# Altium PCB 液晶板.PcbDoc
Units mm, origin at the board's own origin, x right, y up, seen from the top; angles counter-clockwise.
Board outline 152.4 x 101.6 mm, 2 copper layers (Component Side, Bottom Layer), stack 0.325 mm thick; 14 components, 27 nets, 96 pads, 58 vias.
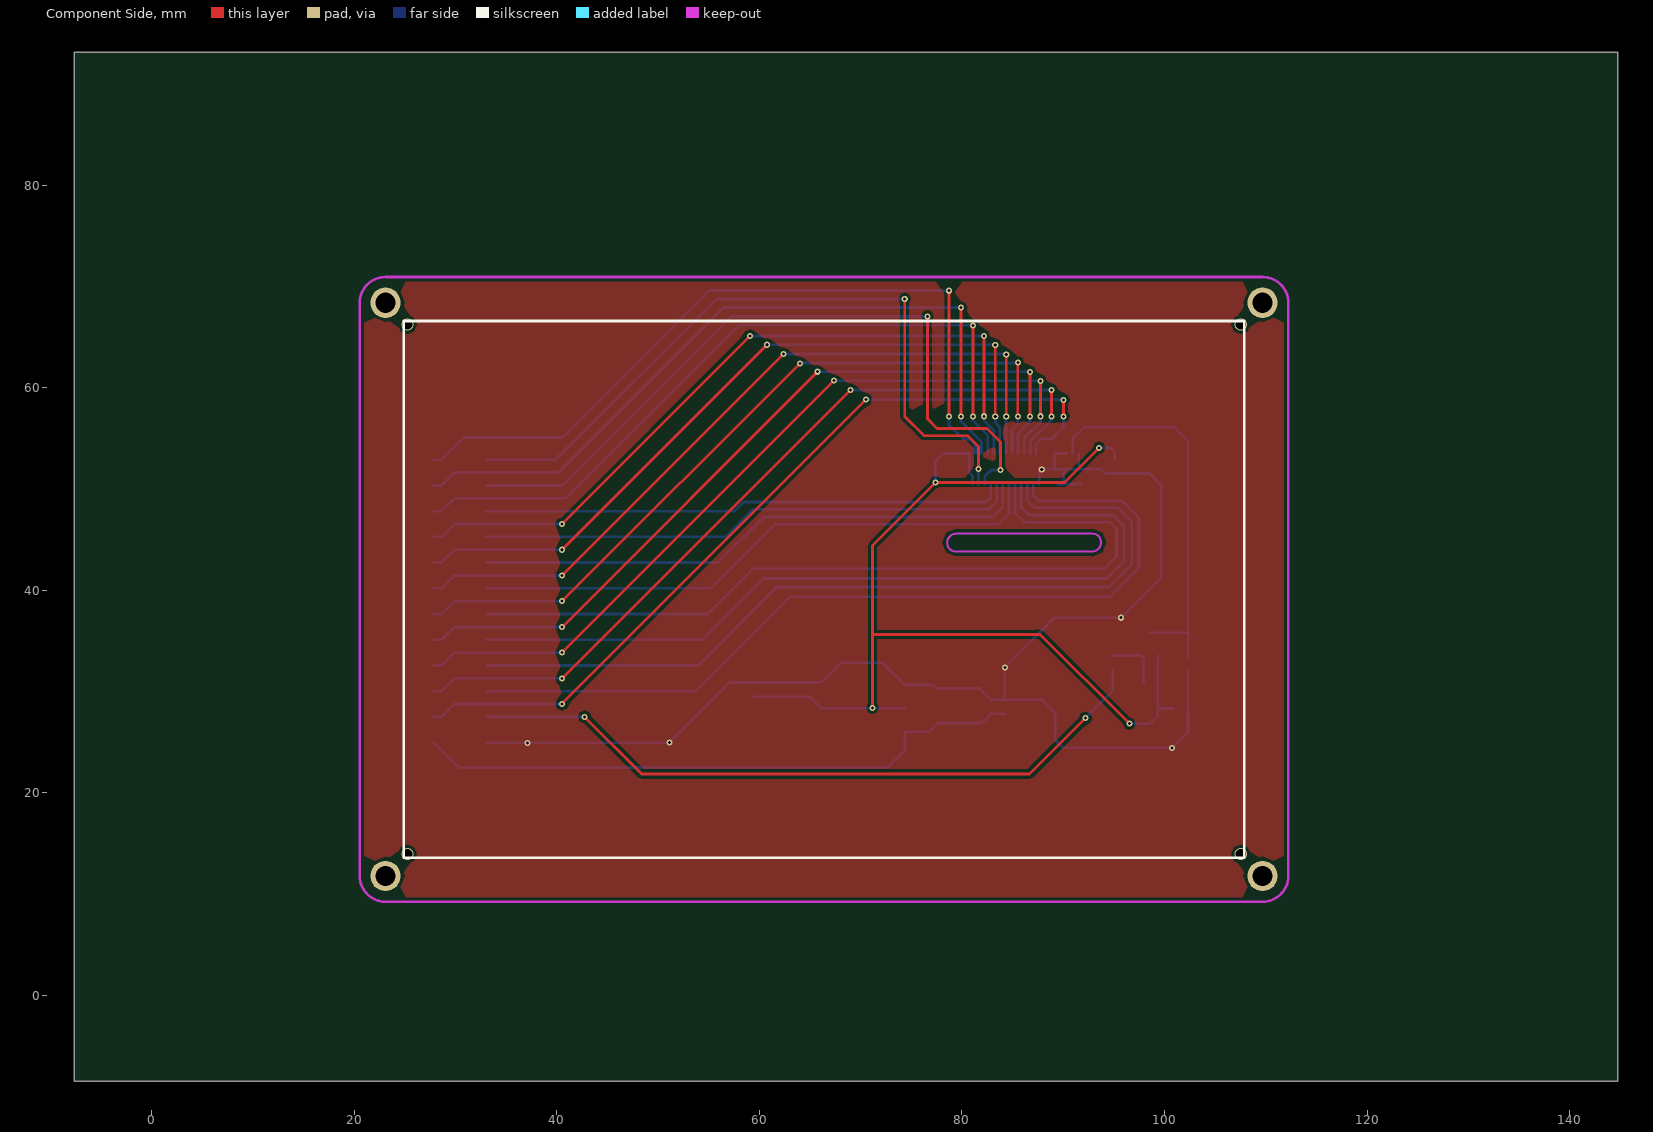
[diagram p0: Component Side view]
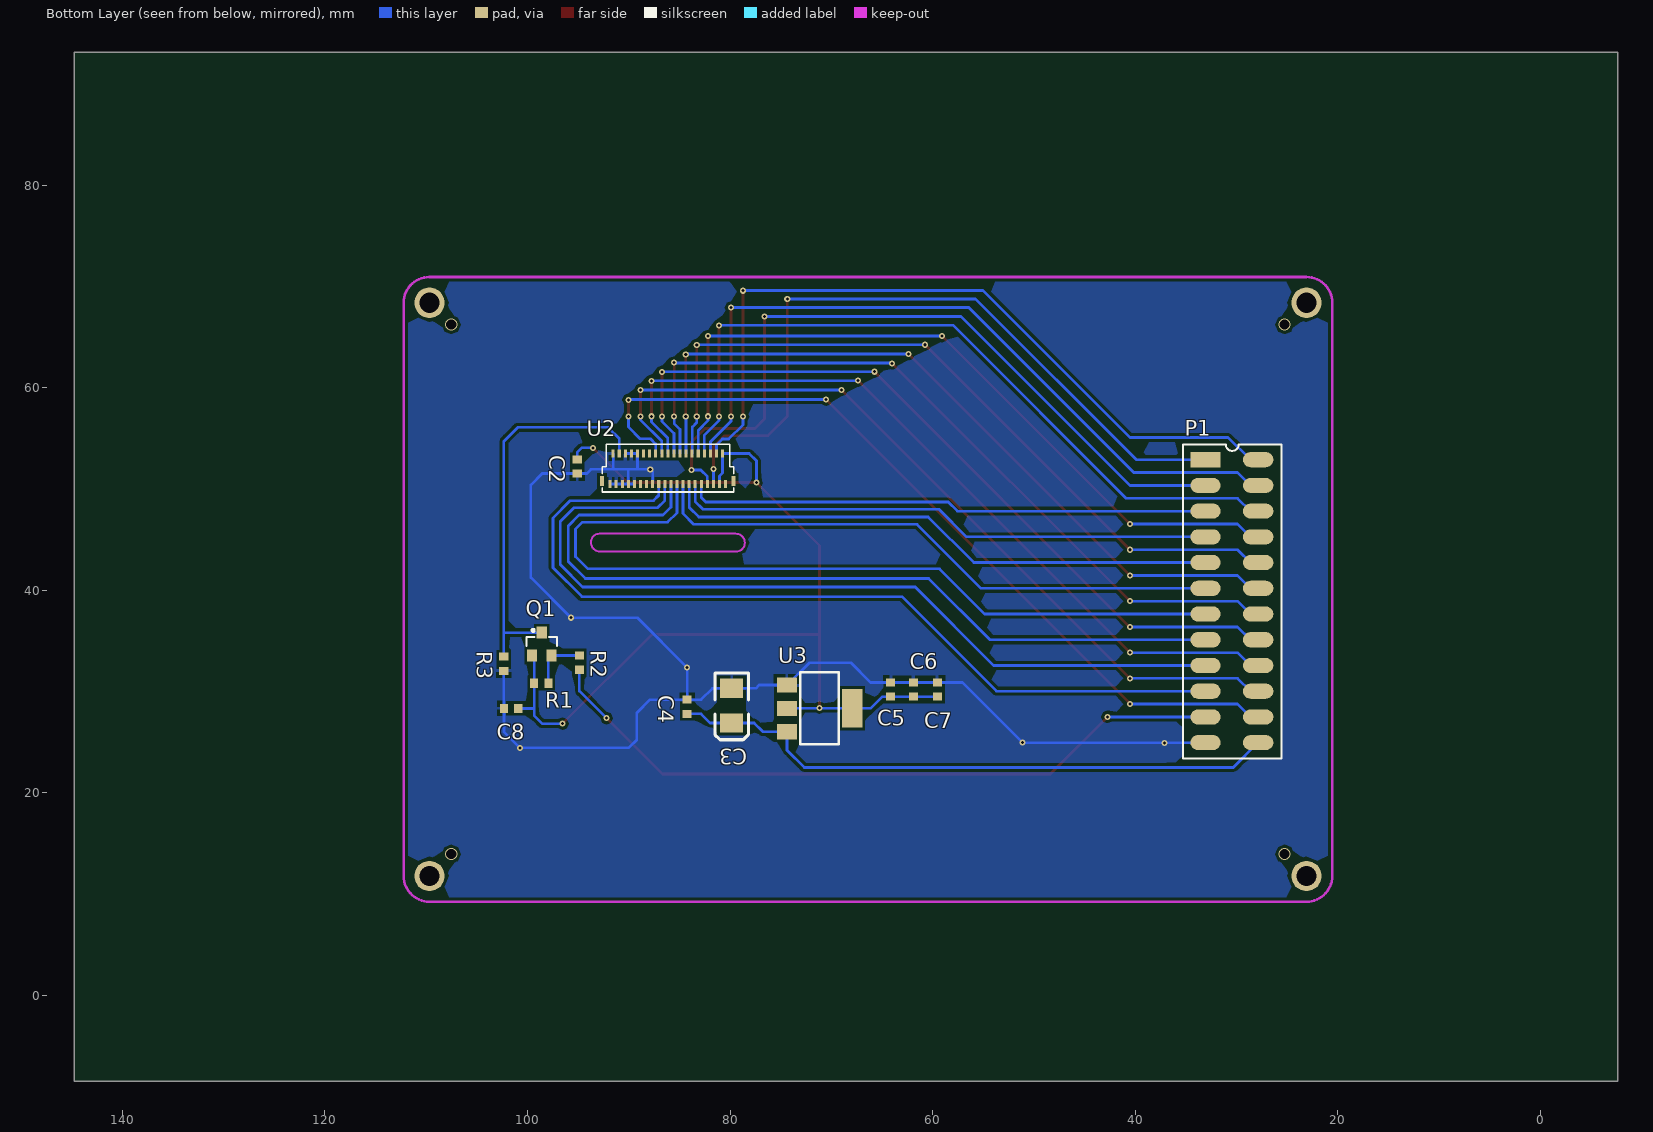
[diagram p1: Bottom Layer view, seen from below]

## Layer stack, top to bottom
Top Solder: solder mask 0.0102, Solder Resist, Dk 3.5
Component Side: signal copper 0.0356
Dielectric 1: core 0.254, FR-4, Dk 4.2
Bottom Layer: signal copper 0.0356
Solder Side: solder mask 0.0102, Solder Resist, Dk 3.5

## Board outline
-7.645,-8.474 144.755,-8.474 144.755,93.126 -7.645,93.126

## Design rules (kind name [scope] priority, off if disabled: settings)
Clearance [All] p1: gap=0.3
PolygonConnect PolygonConnect_1 [IsVia] p1: connectstyle=Direct reliefconductorwidth=0.3 reliefentries=4 polygonreliefangle="90 Angle" airgapwidth=0.3
PolygonConnect [All] p2: connectstyle=Relief reliefconductorwidth=0.3 reliefentries=4 polygonreliefangle="90 Angle" airgapwidth=0.3
RoutingVias [All] p1: holewidth=0.3 width=0.6 viastyle="Through Hole" minholewidth=0.3 minwidth=0.6 maxholewidth=0.3 maxwidth=0.6
SolderMaskExpansion [All] p1: expansion=0.102
UnpouredPolygon [All] p1: allowunpoured=FALSE
Width [All] p1: maxlimit=1 minlimit=0.27 preferedwidth=0.27
29 further rules are at their usual default settings.

## Components (designator, comment, footprint, x,y, rotation, side; value= is the part's Value field where it differs from the comment)
C2 "Cap Semi" 1608[0603] 95.097,52.229 r90 bottom
C3 "Cap Pol2" 3528 79.852,26.896 r270 bottom
C4 "Cap Semi" 1608[0603] 84.237,28.501 r270 bottom
C5 "Cap Semi" 1608[0603] 64.151,30.204 r270 bottom
C6 "Cap Semi" 1608[0603] 61.901,30.204 r270 bottom
C7 "Cap Semi" 1608[0603] 59.523,30.204 r270 bottom
C8 "Cap Semi" 1608[0603] 101.615,28.342 r180 bottom
P1 "Header_2X12" HDR2X12 30.456,38.93 r180 bottom
Q1 "MOSFET-P" SOT23_N 98.598,34.694 r90 bottom
R1 "Res2" 1608[0603] 98.646,30.821 r180 bottom
R2 "Res2" 1608[0603] 94.886,32.859 r270 bottom
R3 "Res2" 1608[0603] 102.354,32.75 r90 bottom
U2 "IPS3P4140" FH26-39S-0.3SHW 86.145,52.008 r180 bottom locked
U3 "AMS1117" SOT223 74.384,30.643 r270 bottom

## Footprints (in the part's own frame and the unit in brackets; to place one, negate y for a bottom-side part, rotate by r counter-clockwise, add the part's x,y. Pads: shape width x height; smd on the part's side, far side on the other; paste and mask are expansions set on the pad)
1608[0603] [mm] "Chip Capacitor, Body 1.6x0.8mm, IPC High Density"
  rect 0.8x0.9 smd: 1(-0.7,0) 2(0.7,0)
  body extent -0.87,-0.48 0.87,0.48, height 1.3
3528 [mil]
  rect 75x90 smd: 1(0,0) 2(-135,0)
  silkscreen extent -195,-65 65,65
FH26-39S-0.3SHW [mm]
  rect 0.3x0.8 smd: 1(5.7,-1.5) 2(5.4,1.5) 3(5.1,-1.5) 4(4.8,1.5) 5(4.5,-1.5) 6(4.2,1.5) 7(3.9,-1.5) 8(3.6,1.5) 9(3.3,-1.5) 10(3,1.5) 11(2.7,-1.5) 12(2.4,1.5) 13(2.1,-1.5) 14(1.8,1.5) 15(1.5,-1.5) 16(1.2,1.5) 17(0.9,-1.5) 18(0.6,1.5) 19(0.3,-1.5) 20(0,1.5) 21(-0.3,-1.5) 22(-0.6,1.5) 23(-0.9,-1.5) 24(-1.2,1.5) 25(-1.5,-1.5) 26(-1.8,1.5) 27(-2.1,-1.5) 28(-2.4,1.5) 29(-2.7,-1.5) 30(-3,1.5) 31(-3.3,-1.5) 32(-3.6,1.5) 33(-3.9,-1.5) 34(-4.2,1.5) 35(-4.5,-1.5) 36(-4.8,1.5) 37(-5.1,-1.5) 38(-5.4,1.5) 39(-5.7,-1.5)
  rect 0.4x1 smd: 40(-6.5,-1.2) 40(6.5,-1.2)
  silkscreen extent -6.5,-2.3 6.5,2.4
HDR2X12 [mm]
  rect 3x1.5 smd: 1(-2.6,13.97)
  oval 3x1.5 smd: 2(-2.6,11.43) 3(-2.6,8.89) 4(-2.6,6.35) 5(-2.6,3.81) 6(-2.6,1.27) 7(-2.6,-1.27) 8(-2.6,-3.81) 9(-2.6,-6.35) 10(-2.6,-8.89) 11(-2.6,-11.43) 12(-2.6,-13.97) 13(2.6,-13.97) 14(2.6,-11.43) 15(2.6,-8.89) 16(2.6,-6.35) 17(2.6,-3.81) 18(2.6,-1.27) 19(2.6,1.27) 20(2.6,3.81) 21(2.6,6.35) 22(2.6,8.89) 23(2.6,11.43) 24(2.6,13.97)
  silkscreen extent -4.8,-15.53 4.9,15.47
SOT23_N [mm] "SOT23, 3-Leads, Body 2.9x1.3mm, Pitch 0.95mm, Lead Span 2.3mm - Reverse Pinning, IPC Medium Density"
  rect 1.2x1 smd: 1(1.125,0) 2(-1.125,-0.95) 3(-1.125,0.95)
  silkscreen extent -0.2,-1.5 1.47,1.5, body extent -0.7,-1.5 0.7,1.5, height 1.1
SOT223 [mil]
  rect 59x79 smd: 1(0,0) 2(90.55,0) 3(181.1,0)
  rect 150x79 smd: 4(89.88,253.54)
  silkscreen extent -49,52 231,202

## Part data
C2 C4 C5 C6 C7 C8: "Capacitor (Semiconductor SIM Model)"
C3: "Polarized Capacitor (Axial)"
Q1: "P-Channel MOSFET"
R1 R2 R3: "Resistor"
U2: "IPS液晶显示屏"
U3: "稳压IC"

## Free pads (board coordinates)
  round 3 hole 2: 0(23.085,11.796) 0(23.085,68.396) 0(109.685,11.796) 0(109.685,68.396)

## Via types
v1: diameter 0.6, hole 0.3, Component Side to Bottom Layer, 54 vias
v2: diameter 1.2, hole 1, Component Side to Bottom Layer, 4 vias

## Nets (pads, with @x,y where several pads share a name; then routed paths per layer and width w, separated by ;. In a path a pad name is that pad's centre, name@x,y a point inside that pad or via, vN(x,y) a via of type N, cw(c..) or ccw(c..) an arc to the next point about the centre after c; other vN are vias at no path point)
3V3: C2.2 C5.2 C6.2 C7.2 C8.2 Q1.3 R1.1 U2.2 U2.3 U3.2 U3.4 | length 108.8
  Component Side w0.27: v1(71.175,28.397) 71.175,35.649 ; v1(93.55,54.071) 90.124,50.645 v1(77.4,50.645) 71.175,44.42 71.175,35.649 ; v1(96.535,26.834) 87.72,35.649 71.175,35.649
  Bottom Layer w0.27: C7.2 C6.2 C5.2 64.956,29.504 66.1,28.36 U3.4 74.367,28.36 U3.2 ; v1(77.4,50.645) 77.4,52.793 78.115,53.508 U2.2 80.745,51.596 81.045,51.296 U2.3 ; v1(93.55,54.071) 94.652,54.071 95.097,53.626 C2.2 ; v1(96.535,26.834) 98.552,26.834 99.346,27.628 R1.1 99.346,33.367 Q1.3 ; 99.346,28.352 99.356,28.342 C8.2
5V: C3.1 C4.2 P1.13 U3.3 | length 60.7
  Bottom Layer w0.27: P1.13 30.315,22.501 72.673,22.501 74.384,24.212 U3.3 76.774,26.043 77.627,26.896 C3.1 81.973,26.896 82.878,27.801 C4.2
GND: C2.1 C3.2 C4.1 C5.1 C6.1 C7.1 C8.1 P1.12 R3.1 U2.25 U2.30 U2.31 U2.32 U2.33 U2.34 U2.35 U2.37 U2.38 U2.39 U3.1 | length 137.8
  Bottom Layer w0.27: P1.12 v1(51.115,24.96) 57.059,30.904 C7.1 C6.1 C5.1 66.122,30.904 68.07,32.852 72.175,32.852 U3.1 77.127,30.643 77.445,30.325 C3.2 81.748,30.325 82.872,29.201 C4.1 ; U2.25 87.645,51.705 v1(87.882,51.942) 90.054,51.942 ; 89.145,51.944 U2.30 U2.32 U2.34 ; U2.31 U2.33 ; U2.38 91.545,51.942 ; U2.39 U2.37 U2.35 U2.33 ; R3.1 102.354,28.381 C8.1 102.315,26.028 v1(100.73,24.443) 90.012,24.443 89.219,25.236 89.219,27.907 87.925,29.201 C4.1 ; C4.1 v1(84.237,32.369) 89.163,37.295 v1(95.715,37.295) 99.678,41.258 99.678,50.399 98.548,51.529 C2.1 94.148,51.529 93.735,51.942 91.545,51.942 ; U2.33 90.045,51.933 90.054,51.942 ; 90.054,51.942 91.545,51.942
  other v1: 37.089,24.933
NetP1_1: P1.1 U2.5 | length 71.7
  Component Side w0.27: v1(74.354,68.775) 74.354,57.18 76.263,55.271 80.557,55.271 81.638,54.19 v1(81.638,51.983)
  Bottom Layer w0.27: P1.1 39.894,52.9 55.769,68.775 v1(74.354,68.775) ; v1(81.638,51.983) 81.638,51.938 81.645,51.945 U2.5
NetP1_2: P1.2 U2.7 | length 74
  Component Side w0.27: v1(76.592,67.044) 76.592,56.939 77.544,55.987 82.466,55.987 83.808,54.645 v1(83.808,51.879)
  Bottom Layer w0.27: P1.2 40.512,50.36 57.196,67.044 v1(76.592,67.044) ; U2.7 82.245,51.23 82.894,51.879 v1(83.808,51.879)
NetP1_3: P1.3 U2.9 | length 51.7
  Bottom Layer w0.27: P1.3 57.554,47.82 58.455,48.721 82.403,48.721 82.845,49.163 U2.9
NetP1_4: P1.4 U2.11 | length 53.6
  Bottom Layer w0.27: P1.4 56.647,45.28 59.372,48.005 82.659,48.005 83.445,48.791 U2.11
NetP1_5: P1.5 U2.13 | length 55.6
  Bottom Layer w0.27: P1.5 55.935,42.74 60.445,47.25 83.09,47.25 84.045,48.205 U2.13
NetP1_6: P1.6 U2.15 | length 57.6
  Bottom Layer w0.27: P1.6 55.222,40.2 61.54,46.518 83.588,46.518 84.645,47.575 U2.15
NetP1_7: P1.7 U2.17 | length 80.8
  Bottom Layer w0.27: P1.7 54.86,37.66 59.318,42.118 94.048,42.118 95.256,43.327 95.256,46.048 94.576,46.728 86.169,46.728 85.245,47.652 U2.17
NetP1_8: P1.8 U2.19 | length 82.8
  Bottom Layer w0.27: P1.8 54.342,35.12 60.397,41.175 94.29,41.175 95.98,42.865 95.98,46.355 94.904,47.431 86.628,47.431 85.845,48.214 U2.19
NetP1_9: P1.9 U2.21 | length 84.9
  Bottom Layer w0.27: P1.9 53.98,32.58 61.718,40.318 94.553,40.318 96.77,42.535 96.77,46.816 95.431,48.155 87.156,48.155 86.445,48.866 U2.21
NetP1_10: P1.10 U2.23 | length 86.9
  Bottom Layer w0.27: P1.10 53.699,30.04 63.033,39.375 94.64,39.375 97.495,42.229 97.495,47.145 95.783,48.857 87.573,48.857 87.045,49.385 U2.23
NetP1_11: P1.11 R2.2 | length 69.7
  Component Side w0.27: v1(42.742,27.5) 48.383,21.859 86.677,21.859 v1(92.201,27.383)
  Bottom Layer w0.27: P1.11 v1(42.742,27.5) ; v1(92.201,27.383) 94.886,30.068 R2.2
NetP1_14: P1.14 U2.24 | length 82.2
  Component Side w0.27: v1(40.513,28.767) 40.513,28.845 v1(70.513,58.845) ; v1(90.041,57.177) v1(90.041,58.794)
  Bottom Layer w0.27: P1.14 28.628,27.5 29.895,28.767 v1(40.513,28.767) ; v1(70.513,58.845) v1@90.041,58.845 ; U2.24 87.345,54.444 87.869,54.968 88.876,54.968 90.041,56.133 v1(90.041,57.177)
NetP1_15: P1.15 U2.22 | length 80.5
  Component Side w0.27: v1(40.513,31.307) v1(68.997,59.791) ; v1(88.853,57.158) v1(88.853,59.8)
  Bottom Layer w0.27: P1.15 28.628,30.04 29.895,31.307 v1(40.513,31.307) ; v1(68.997,59.791) v1@88.853,59.791 ; U2.22 86.745,54.728 88.853,56.836 v1(88.853,57.158)
NetP1_16: P1.16 U2.20 | length 79.4
  Component Side w0.27: v1(40.513,33.847) v1(67.368,60.702) ; v1(87.751,57.186) v1(87.751,60.685)
  Bottom Layer w0.27: P1.16 28.628,32.58 29.895,33.847 v1(40.513,33.847) ; v1(67.368,60.702) v1@87.751,60.702 ; U2.20 86.145,55.012 87.751,56.618 v1(87.751,57.186)
NetP1_17: P1.17 U2.18 | length 78.4
  Component Side w0.27: v1(40.513,36.387) 40.555,36.387 v1(65.753,61.585) ; v1(86.715,57.167) v1(86.715,61.558)
  Bottom Layer w0.27: P1.17 28.628,35.12 29.895,36.387 v1(40.513,36.387) ; v1(65.753,61.585) v1@86.715,61.585 ; U2.18 85.545,55.502 86.715,56.672 v1(86.715,57.167)
NetP1_18: P1.18 U2.16 | length 77.3
  Component Side w0.27: v1(40.513,38.927) v1(64.003,62.416) ; v1(85.527,57.167) v1(85.527,62.487)
  Bottom Layer w0.27: P1.18 28.628,37.66 29.895,38.927 v1(40.513,38.927) ; v1(64.003,62.416) 64.033,62.447 v1@85.527,62.447 ; U2.16 84.945,55.893 85.527,56.475 v1(85.527,57.167) v1@85.676,57.167
NetP1_19: P1.19 U2.14 | length 75.9
  Component Side w0.27: v1(40.513,41.467) v1(62.376,63.33) ; v1(84.377,57.167) v1(84.377,63.301)
  Bottom Layer w0.27: P1.19 28.628,40.2 29.895,41.467 v1(40.513,41.467) ; v1(62.376,63.33) v1@84.377,63.33 ; U2.14 84.345,57.118 84.386,57.159 84.394,57.167 v1(84.377,57.167)
NetP1_20: P1.20 U2.12 | length 75.3
  Component Side w0.27: v1(40.513,44.007) v1(60.756,64.25) ; v1(83.294,57.167) v1(83.294,64.237)
  Bottom Layer w0.27: P1.20 28.628,42.74 29.895,44.007 v1(40.513,44.007) ; v1(60.756,64.25) v1@83.294,64.25 ; v1(83.294,57.167) 83.294,56.558 83.73,56.122 83.73,53.523 U2.12
NetP1_21: P1.21 U2.10 | length 74.5
  Component Side w0.27: v1(40.513,46.547) v1(59.083,65.117) ; v1(82.173,57.186) v1(82.173,65.102)
  Bottom Layer w0.27: P1.21 28.628,45.28 29.895,46.547 v1(40.513,46.547) ; v1(59.083,65.117) v1@82.173,65.117 ; v1(82.173,57.186) 82.173,56.761 83.145,55.789 U2.10
NetP1_22: P1.22 U2.8 | length 74.1
  Component Side w0.27: v1(81.089,57.177) v1(81.089,66.163)
  Bottom Layer w0.27: P1.22 28.628,47.82 29.895,49.087 40.879,49.087 57.96,66.168 v1@81.089,66.168 ; v1(81.089,57.177) 81.089,56.779 82.545,55.323 U2.8
NetP1_23: P1.23 U2.6 | length 74.6
  Component Side w0.27: v1(79.92,57.177) v1(79.92,67.91)
  Bottom Layer w0.27: P1.23 28.628,50.36 29.895,51.627 40.138,51.627 56.431,67.92 v1@79.92,67.92 ; v1(79.92,57.177) 79.92,56.693 81.051,55.562 81.945,54.668 U2.6
NetP1_24: P1.24 U2.4 | length 75.3
  Component Side w0.27: v1(78.732,57.148) v1(78.732,69.584)
  Bottom Layer w0.27: P1.24 28.628,52.9 30.826,55.098 40.513,55.098 55.025,69.61 v1@78.732,69.61 ; v1(78.732,57.148) 78.732,56.343 80.141,54.934 80.769,54.934 81.345,54.358 U2.4
NetQ1_1: Q1.1 R3.2 U2.36 | length 38.9
  Bottom Layer w0.27: U2.36 90.945,54.992 92.045,56.092 100.97,56.092 102.345,54.717 102.345,35.797 ; Q1.1 102.323,35.819 102.345,35.797 ; R3.2@102.345,33.45 102.345,35.797
NetQ1_2: Q1.2 R1.2 R2.1 | length 5.6
  Bottom Layer w0.27: R2.1 97.638,33.559 Q1.2 97.946,33.271 R1.2
pads on no net: U2.1 U2.26 U2.27 U2.28 U2.29 U2.40
copper on no net:
  other v2: 25.247,13.95 107.531,13.95 25.247,66.242 107.531,66.242

## Polygon pours and split planes (outlines as drawn)
GND on Component Side "Top Layer-No Net" (solid, pour order 13): 23.085,70.942 20.539,68.396 20.539,11.796 23.085,9.25 109.685,9.25 112.231,11.796 112.231,68.396 109.685,70.942
GND on Bottom Layer "Bottom Layer-No Net" (solid, pour order 15): 23.085,70.942 20.539,68.396 20.539,11.796 23.085,9.25 109.685,9.25 112.231,11.796 112.231,68.396 109.685,70.942

## Keep-outs
Keep-Out Layer:
  lines w0.2: 78.547,44.689 ccw(c79.393,44.689) 79.393,43.842 92.847,43.842 ccw(c92.847,44.742) 93.747,44.742 ccw(c92.9,44.742) 92.9,45.589 79.446,45.589 ccw(c79.446,44.689) 78.546,44.689
  lines w0.254: 20.539,11.796 ccw(c23.085,11.796) 23.085,9.25 109.685,9.25 ccw(c109.685,11.796) 112.231,11.796 112.231,68.396 ccw(c109.685,68.396) 109.685,70.942 23.085,70.942 ccw(c23.085,68.396) 20.539,68.396 20.539,11.796

## Other copper
Component Side:
  pour cut-out: 79.446,45.589 78.546,44.689 78.547,44.689 79.393,43.842 92.847,43.842 93.747,44.742 92.901,45.589
Bottom Layer:
  pour cut-out: 79.446,45.589 78.546,44.689 78.547,44.689 79.393,43.842 92.847,43.842 92.847,43.843 93.747,44.742 92.9,45.589

## Silkscreen, mask and mechanical layers (free items; w line width, h text height)
Top Overlay:
  lines w0.254: 24.893,13.596 107.885,13.596 107.885,66.596 24.893,66.596 24.893,13.596